# Altium PCB ife18_TS_BMS_Master_STM32.PcbDoc
Units mm, origin at the board's own origin, x right, y up, seen from the top; angles counter-clockwise.
Board outline 90 x 63 mm, 2 copper layers (Top Layer, Bottom Layer); 69 components, 58 nets, 284 pads, 52 vias.
Unrouted connection lines stored in the file: 69.
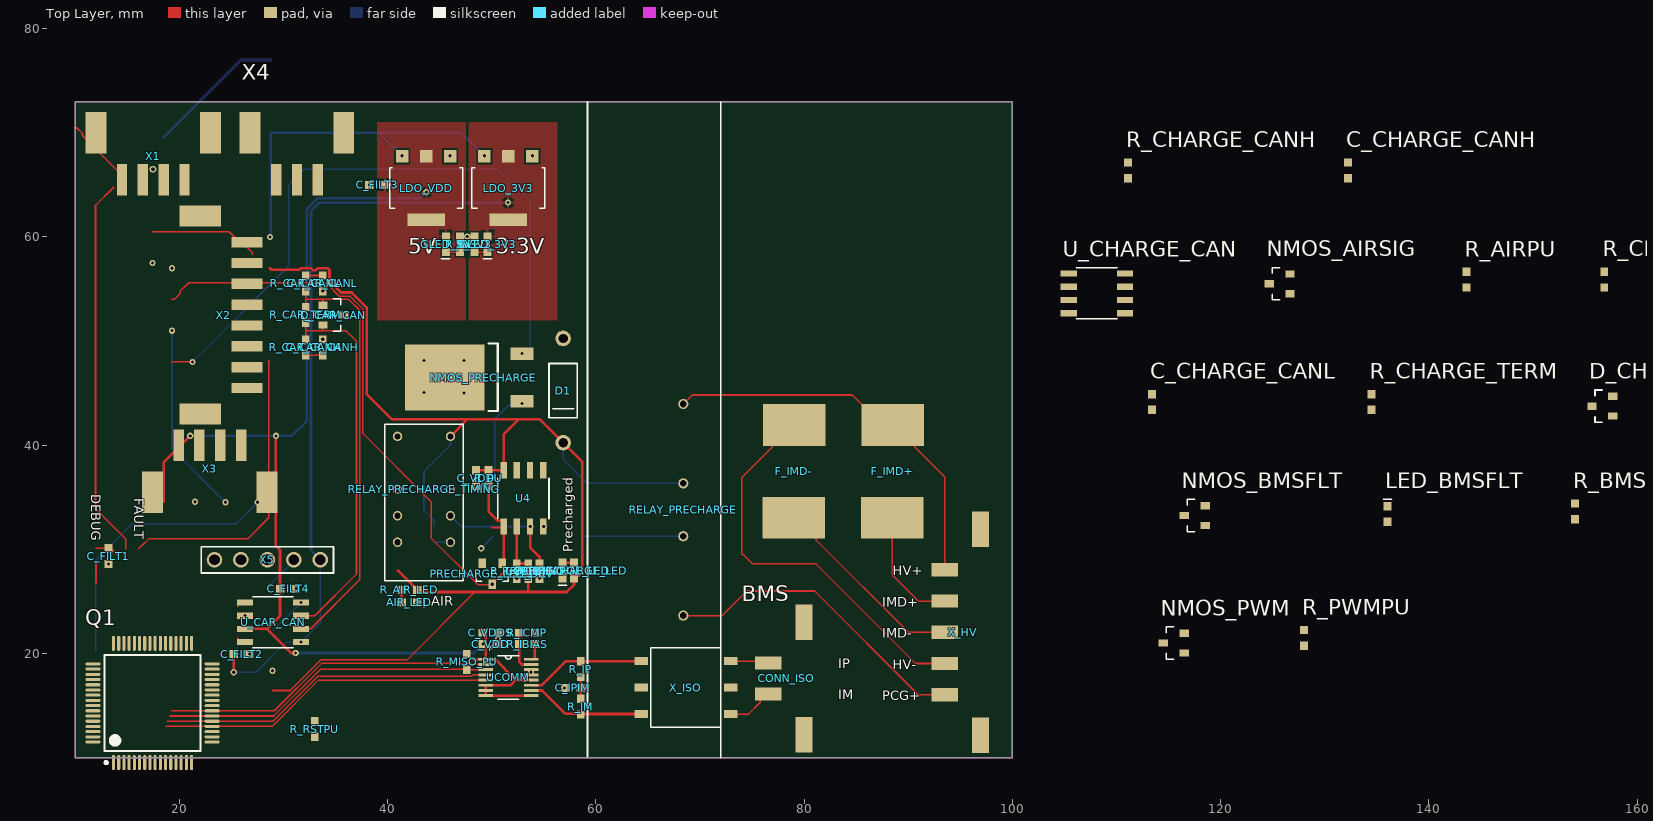
[diagram p0: Top Layer view]
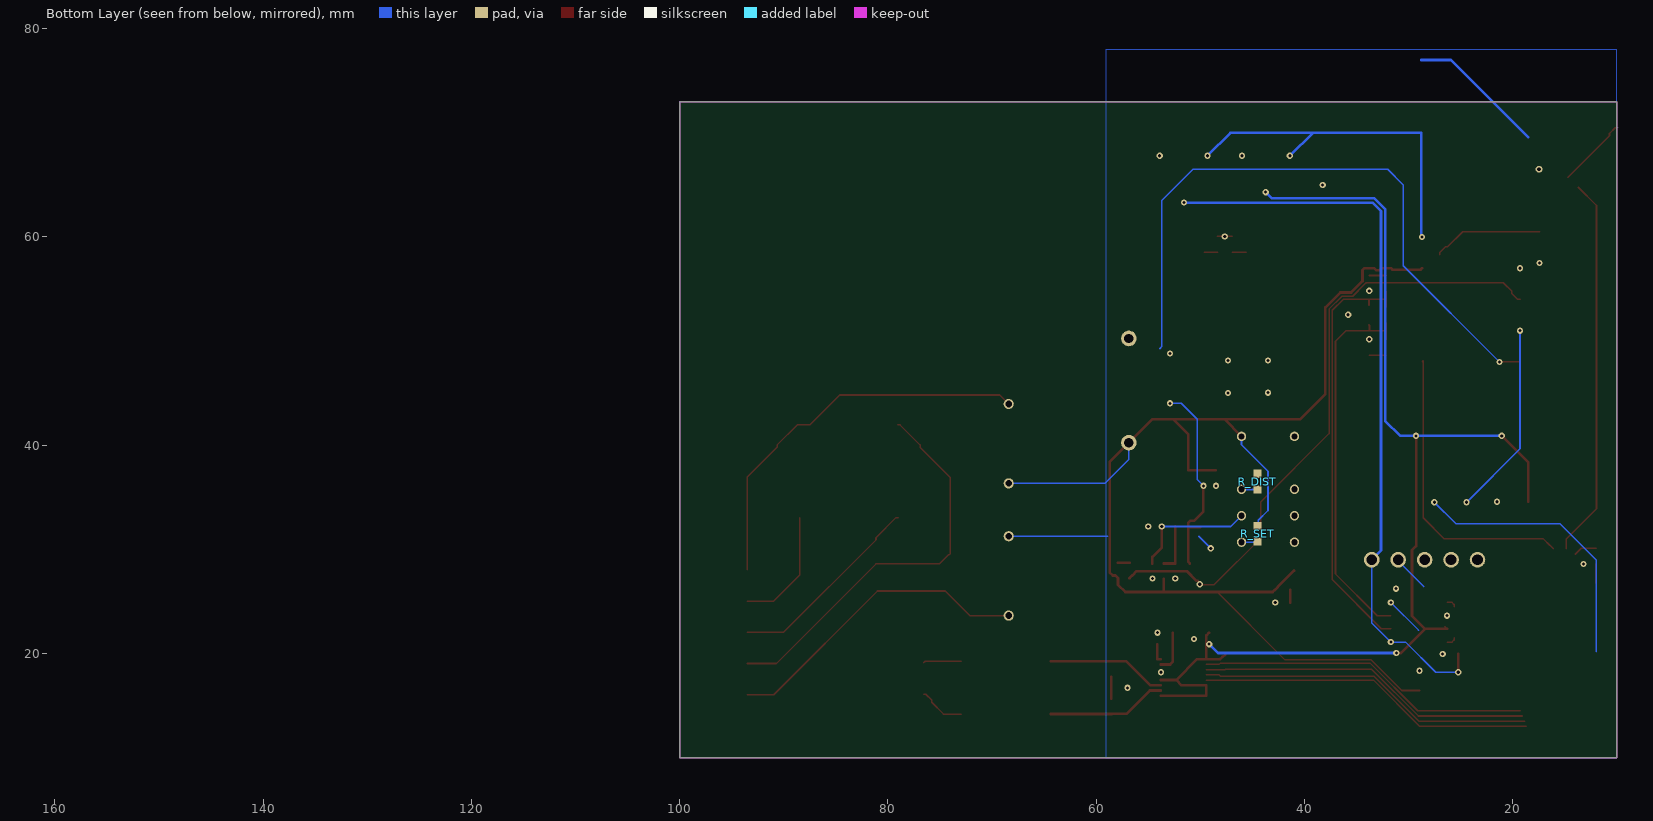
[diagram p1: Bottom Layer view, seen from below]

## Layer stack, top to bottom
Top Solder: solder mask 0.0102, Solder Resist, Dk 3.5
Top Layer: signal copper 0.0356
Dielectric 1: dielectric 0.32, FR-4, Dk 4.8
Bottom Layer: signal copper 0.0356
Bottom Solder: solder mask 0.0102, Solder Resist, Dk 3.5

## Board outline
10,10 10,73 100,73 100,10

## Design rules (kind name [scope] priority, off if disabled: settings)
BoardOutlineClearance [All] p1: gap=0.2 ignorepadtopadclearanceinfootprint=FALSE
Clearance "Board Outline" [OnLayer('Keep-Out Layer')] p1: gap=0.2 ignorepadtopadclearanceinfootprint=FALSE
Clearance "Tractive Net Class" [InNetClass('Tractive')] p2: gap=0.8 ignorepadtopadclearanceinfootprint=FALSE
Clearance [NOT InNetClass('Tractive')] p3: gap=0.152 ignorepadtopadclearanceinfootprint=FALSE
HoleSize [All] p1: absolutevalues=TRUE maxlimit=6.3 minlimit=0.3 maxpercent=80.000 minpercent=20.000
MinimumAnnularRing [All] p1: minimumring=0.076
MinimumSolderMaskSliver [All] p1: minsoldermaskwidth=0
PolygonConnect "SOT223 Planes" [HasFootprint('SOT223')] p1: connectstyle=Direct reliefconductorwidth=0.254 reliefentries=4 polygonreliefangle="90 Angle" airgapwidth=0.254
PolygonConnect [All] p2: connectstyle=Relief reliefconductorwidth=0.254 reliefentries=4 polygonreliefangle="90 Angle" airgapwidth=0.254
RoomDefinition U_Precharge [InComponentClass('U_Precharge')] p1: confinementstyle=ConfineIn formatcopy=TRUE lockcomponents=FALSE outline 39,10 72,10 72,78 39,78
RoomDefinition U_Comms [InComponentClass('U_Comms')] p2: confinementstyle=ConfineIn formatcopy=TRUE lockcomponents=FALSE outline 39,10 100,10 100,78 39,78
RoutingVias [All] p1: holewidth=0.3 width=0.6 viastyle="Through Hole" minholewidth=0.3 minwidth=0.6 maxholewidth=6.3 maxwidth=10
SilkToSilkClearance [All] p1: silktosilkclearance=0
SilkToSolderMaskClearance [IsPad] p1: minsilkscreentomaskgap=0 clearancetoexposedcopper=TRUE
SolderMaskExpansion [All] p1: expansion=0.051
Width [All] p1: maxlimit=2.54 minlimit=0.152 preferedwidth=0.254
26 further rules are at their usual default settings.

## Classes and differential pairs
net class Tractive: HV+ HV- IM_ISO IMD+ IMD- IP_ISO Precharge+
component class U_Precharge: AIR_LED C_TIMING C_VDD D1 NMOS_PRECHARGE PRECHARGE_LED PRECHARGE_LED_DRV R_AIR_LED R_DIST R_PRECHARGE_LED R_PU R_SET R_TRIG_B R_TRIG_T RELAY_PRECHARGE RELAY_PRECHARGE_TIMING U4
component class U_Comms: C_IPIM C_VDD C_VDDS CONN_ISO R_IBIAS R_ICMP R_IM R_IP R_MISO_PU UCOMM X_ISO
component class ife18_TS_BMS_Master: C_CAR_CANH C_CAR_CANL C_CHARGE_CANH C_CHARGE_CANL C_FILT1 C_FILT2 C_FILT3 C_FILT4 D_CAR_CAN D_CHARGE_CAN F_IMD+ F_IMD- GLED_3V3 GLED_5V GLED_DEBUG LDO_3V3 LDO_VDD LED_BMSFLT NMOS_AIRSIG NMOS_BMSFLT NMOS_PWM Q1 R_3V3 R_5V R_AIRPU R_BMSFLT R_CAR_CANH R_CAR_CANL R_CAR_TERM R_CHARGE_CANH R_CHARGE_CANL R_CHARGE_TERM R_PWMPU R_RSTPU U_CAR_CAN U_CHARGE_CAN X1 X2 X3 X4 X5 X_HV

## Components (designator, comment, footprint, x,y, rotation, side; value= is the part's Value field where it differs from the comment)
AIR_LED "" LEDRED-0603 42.1,24.9 r0 top
C_CAR_CANH "560p" CAP-0603 33.775,49.4 r90 top
C_CAR_CANL "560p" CAP-0603 33.775,55.55 r270 top
C_CHARGE_CANH "560p" CAP-0603 132.216,66.402 r90 top
C_CHARGE_CANL "560p" CAP-0603 113.412,44.152 r90 top
C_FILT1 "1u" CAP-0603 13.2,29.35 r90 top
C_FILT2 "1u" CAP-0603 25.975,19.95 r180 top
C_FILT3 "1u" CAP-0603 39,65 r0 top
C_FILT4 "1u" CAP-0603 30.45,26.225 r180 top
C_IPIM "10n" CAP-0603 57.8,16.7 r180 top
C_TIMING "33u" CAP-0603 54.6,27.9 r90 top
C_VDD "1u" CAP-0603 48.5,36.85 r90 top
C_VDD "1u" CAP-0603 49.9,20.9 r180 top
C_VDDS "1u" CAP-0603 49.9,22 r180 top
CONN_ISO "" 43650-0224 80,17.6 r90 top
D1 "" DO41-10 56.853,45.25 r270 top
D_CAR_CAN "DIODE-SOT23_PESD1CAN" SOT23 34.8,52.5 r270 top
D_CHARGE_CAN "DIODE-SOT23_PESD1CAN" SOT23 156.664,43.752 r90 top
F_IMD+ "FUSE_885" FUSE_885 88.5,37.5 r270 top
F_IMD- "FUSE_885" FUSE_885 79,37.5 r90 top
GLED_3V3 "" LEDGREEN-0603 49.6,59.3 r270 top
GLED_5V "" LEDGREEN-0603 45.6,59.3 r270 top
LDO_3V3 "3V3" SOT223 51.6,64.7 r180 top
LDO_VDD "5V" SOT223 43.7,64.7 r180 top
LED_BMSFLT "LEDRED-0603" LEDRED-0603 136.007,33.402 r90 top
NMOS_AIRSIG "NMOS-SOT23" SOT23 125.659,55.502 r90 top
NMOS_BMSFLT "NMOS-SOT23" SOT23 117.506,33.252 r90 top
NMOS_PRECHARGE "NMOS-TO252" TO252 45.491,46.479 r90 top
NMOS_PWM "NMOS-SOT23" SOT23 115.5,21 r90 top
PRECHARGE_LED "" LEDGREEN-0603 56.8,27.97 r270 top
PRECHARGE_LED_DRV "" SOT23 50.05,27.65 r180 top
Q1 "STM32F446RET6" TSQFP50P1200X1200X160-64N 17.43,15.25 r90 top
R_3V3 "200" RES-0603 48.35,59.3 r90 top
R_5V "200" RES-0603 46.95,59.3 r90 top
R_AIR_LED "1K" RES-0603 42.1,26.1 r180 top
R_AIRPU "10K" RES-0603 143.61,55.902 r90 top
R_BMSFLT "860" RES-0603 154.033,33.652 r90 top
R_CAR_CANH "100" RES-0603 32.15,49.4 r270 top
R_CAR_CANL "100" RES-0603 32.15,55.55 r90 top
R_CAR_TERM "120" RES-0603 32.15,52.525 r270 top
R_CHARGE_CANH "100" RES-0603 111.115,66.402 r90 top
R_CHARGE_CANL "100" RES-0603 156.836,55.902 r90 top
R_CHARGE_TERM "120" RES-0603 134.488,44.152 r90 top
R_DIST "1.5K" RES-0603 44.5,36.5 r90 bottom
R_IBIAS "1K" RES-0603 53.4,20.9 r0 top
R_ICMP "1K" RES-0603 53.4,22 r180 top
R_IM "50" RES-0603 58.55,14.9 r90 top
R_IP "50" RES-0603 58.55,18.5 r270 top
R_MISO_PU "4K" RES-0603 47.6,19.2 r90 top
R_PRECHARGE_LED "1K" RES-0603 57.9,27.97 r270 top
R_PU "10K" RES-0603 49.7,36.85 r90 top
R_PWMPU "10K" RES-0603 128,21.5 r90 top
R_RSTPU "10K" RES-0603 33,12.75 r90 top
R_SET "220K" RES-0603 44.5,31.5 r90 bottom
R_TRIG_B "6.3K" RES-0603 52.4,27.9 r90 top
R_TRIG_T "3.7K" RES-0603 53.5,27.9 r270 top
RELAY_PRECHARGE "COTO9104" 9104-SIP4 68.4,33.8 r270 top
RELAY_PRECHARGE_TIMING "" RELAY-DPDT_EC2 43.5,34.5 r270 top
U4 "" SOIC8 53.05,34.9 r0 top
U_CAR_CAN "IC-SOIC8_MCP2562" SOIC8 29,23 r270 top
U_CHARGE_CAN "IC-SOIC8_MCP2562" SOIC8 108.108,54.577 r90 top
UCOMM "IC-MSOP16_LTC6820" MSOP16 51.6,17.7 r0 top
X1 "Molex 505575-04 4 Position 2.00mm pitch connector wire to board connector Datasheet" 505578-04 17.5,66 r0 top
X2 "POS8_ML505578-08" 505575-08 26,52.5 r90 top
X3 "Molex 505575-04 4 Position 2.00mm pitch connector wire to board connector Datasheet" 505578-04 22.93,39.5 r180 top
X4 "Molex 505575-03 3 Position 2.00mm pitch connector wire to board connector Datasheet" 505578-03 31.3,66 r0 top
X5 "" POS5_254MM_MALE 28.46,29 r180 top
X_HV "Molex - Micro-Fit 3.0 Series connector,  3.00mm (0.118\") pitch header, 5 positions." 43650-0524 97,22 r90 top
X_ISO "XFMR_HM2101NL" HM2101 68.65,16.725 r90 top

## Footprints (in the part's own frame and the unit in brackets; to place one, negate y for a bottom-side part, rotate by r counter-clockwise, add the part's x,y. Pads: shape width x height; smd on the part's side, far side on the other; paste and mask are expansions set on the pad)
9104-SIP4 [mm]
  round 0.975 / inner round 1.524 / far side round 0.975 hole 0.65: 1(-10.16,0) 3(-2.54,0) 5(2.54,0) 7(10.16,0)
  body extent -12.03,-3.23 12.03,2.97, height 8.14
43650-0224 [mm]
  rect 1.27x2.54 smd: P$1(1.5,3.43) P$2(-1.5,3.43)
  rect 3.43x1.65 smd: TAB1(5.39,0) TAB2(-5.39,0)
  body extent -6.82,-2.47 6.83,4.1, height 9.95
43650-0524 [mm]
  rect 1.27x2.54 smd: P$1(6.036,3.503) P$2(3.036,3.503) P$3(0.036,3.503) P$4(-2.964,3.503) P$5(-5.964,3.503)
  rect 3.43x1.65 smd: TAB1(9.926,0.073) TAB2(-9.854,0.073)
  body extent -11.32,-2.47 11.32,4.1, height 9.95
505575-08 [mm]
  rect 1x3 smd: 1(-7,-0.5) 2(-5,-0.5) 3(-3,-0.5) 4(-1,-0.5) 5(1,-0.5) 6(3,-0.5) 7(5,-0.5) 8(7,-0.5)
  rect 2x4 smd: P$3(-9.5,4) P$4(9.5,4)
  body extent -10,-1.41 10,6, height 8.62
505578-03 [mm]
  rect 1x3 smd: 1(-2,-0.5) 2(0,-0.5) 3(2,-0.5)
  rect 2x4 smd: P$3(-4.5,4) P$4(4.5,4)
  body extent -5,-1.1 5,8.35, height 5.9
505578-04 [mm]
  rect 1x3 smd: 1(-3,-0.5) 2(-1,-0.5) 3(1,-0.5) 4(3,-0.5)
  rect 2x4 smd: P$3(-5.5,4) P$4(5.5,4)
  body extent -6,-1.02 6,8.43, height 5.9
CAP-0603 [mm]
  rect 0.8x0.75 smd: 1(-0.75,0) 2(0.75,0)
  body extent -0.8,-0.4 0.8,0.42, height 0.81
DO41-10 [mm]
  round 1.5 hole 0.9 unplated: A(-5,0) K(5,0)
  silkscreen extent -2.6,-1.35 2.6,1.35, body extent -2.6,-1.34 2.6,1.35, height 2.85
FUSE_885 [mm]
  rect 4x6 smd: 1(-4.45,0) 2(4.45,-0.05)
  body extent -5.45,-2.4 5.45,2.4, height 4.95
HM2101 [mm]
  rect 0.76x1.27 smd: 1(-2.54,-4.3) 2(0,-4.3) 3(2.54,-4.3) 4(2.54,4.3) 5(0,4.3) 6(-2.54,4.3)
  silkscreen extent -3.81,-3.36 3.81,3.36, body extent -3.81,-4.44 3.81,4.44, height 5.71
LEDGREEN-0603 [mm]
  rect 0.8x0.75 smd: A(-0.75,0) K(0.75,0)
  silkscreen extent 1.4,-0.42 1.4,0.38, body extent -0.8,-0.4 0.8,0.4, height 0.53
LEDRED-0603 [mm]
  rect 0.8x0.75 smd: A(-0.75,0) K(0.75,0)
  silkscreen extent 1.4,-0.42 1.4,0.38, body extent -0.8,-0.4 0.8,0.4, height 0.53
MSOP16 [mil]
  rect 55x11 smd: 1(-86,68.95) 2(-86,49.25) 3(-86,29.55) 4(-86,9.85) 5(-86,-9.85) 6(-86,-29.55) 7(-86,-49.25) 8(-86,-68.95) 9(86,-68.95) 10(86,-49.25) 11(86,-29.55) 12(86,-9.85) 13(86,9.85) 14(86,29.55) 15(86,49.25) 16(86,68.95)
  silkscreen extent -39,-82 39,82, body extent -99,-81 100,82, height 43
POS5_254MM_MALE [mm]
  round 1.5 hole 1.02 unplated: P$1(-5.08,0) P$2(-2.54,0) P$3(0,0) P$4(2.54,0) P$5(5.08,0)
  silkscreen extent -6.35,-1.27 6.35,1.27, body extent -6.35,-1.24 6.35,1.25, height 8.54
RELAY-DPDT_EC2 [mm]
  round 0.9 / inner round 1.524 / far side round 0.9 hole 0.6: 1(-6.35,2.54) 3(-1.27,2.54) 4(1.27,2.54) 5(3.81,2.54) 8(3.81,-2.54) 9(1.27,-2.54) 10(-1.27,-2.54) 12(-6.35,-2.54)
  silkscreen extent -7.5,-3.75 7.5,3.75, body extent -7.4,-3.75 7.6,3.75, height 8.9
RES-0603 [mm]
  rect 0.8x0.75 smd: 1(-0.75,0) 2(0.75,0)
  body extent -0.8,-0.4 0.8,0.4, height 0.44
SOIC8 [mm]
  rect 0.6x1.55 smd: 1(-1.905,-2.7) 2(-0.635,-2.7) 3(0.635,-2.7) 4(1.905,-2.7) 5(1.905,2.7) 6(0.635,2.7) 7(-0.635,2.7) 8(-1.905,2.7)
  silkscreen extent -2.45,-1.95 2.45,1.95, body extent -2.45,-3.01 2.45,3.01, height 1.5
SOT23 [mm]
  rect 0.7x0.9 smd: 1(-0.95,-1) 2(0.95,-1) 3(0,1)
  silkscreen extent -1.55,0 1.55,0.71, body extent -1.45,-1.41 1.45,1.41, height 1.5
SOT223 [mm]
  rect 1.2x1.2 smd: 1(-2.3,-3.05) 2(0,-3.05) 3(2.3,-3.05)
  rect 3.6x1.2 smd: 4(0,3.05)
  silkscreen extent -3.5,-1.95 3.5,1.95, body extent -3.25,-3.52 3.25,3.5, height 1.8
TO252 [mm]
  rect 1.2x2.2 smd: 1(-2.279,-7.409) 3(2.321,-7.409)
  rect 6.35x7.62 smd: 2(0.021,-0.009)
  silkscreen extent -3.2,-5.09 3.3,-4.2, body extent -3.22,-7.29 3.28,1.41, height 2.3
TSQFP50P1200X1200X160-64N [mm] "TSQFP, 64-Leads, Body 10.00x10.00mm, Pitch 0.50mm, IPC Medium Density"
  oval 1.45x0.3 smd: 1(-5.725,3.75) 2(-5.725,3.25) 3(-5.725,2.75) 4(-5.725,2.25) 5(-5.725,1.75) 6(-5.725,1.25) 7(-5.725,0.75) 8(-5.725,0.25) 9(-5.725,-0.25) 10(-5.725,-0.75) 11(-5.725,-1.25) 12(-5.725,-1.75) 13(-5.725,-2.25) 14(-5.725,-2.75) 15(-5.725,-3.25) 16(-5.725,-3.75) 33(5.725,-3.75) 34(5.725,-3.25) 35(5.725,-2.75) 36(5.725,-2.25) 37(5.725,-1.75) 38(5.725,-1.25) 39(5.725,-0.75) 40(5.725,-0.25) 41(5.725,0.25) 42(5.725,0.75) 43(5.725,1.25) 44(5.725,1.75) 45(5.725,2.25) 46(5.725,2.75) 47(5.725,3.25) 48(5.725,3.75)
  oval 0.3x1.45 smd: 17(-3.75,-5.725) 18(-3.25,-5.725) 19(-2.75,-5.725) 20(-2.25,-5.725) 21(-1.75,-5.725) 22(-1.25,-5.725) 23(-0.75,-5.725) 24(-0.25,-5.725) 25(0.25,-5.725) 26(0.75,-5.725) 27(1.25,-5.725) 28(1.75,-5.725) 29(2.25,-5.725) 30(2.75,-5.725) 31(3.25,-5.725) 32(3.75,-5.725) 49(3.75,5.725) 50(3.25,5.725) 51(2.75,5.725) 52(2.25,5.725) 53(1.75,5.725) 54(1.25,5.725) 55(0.75,5.725) 56(0.25,5.725) 57(-0.25,5.725) 58(-0.75,5.725) 59(-1.25,5.725) 60(-1.75,5.725) 61(-2.25,5.725) 62(-2.75,5.725) 63(-3.25,5.725) 64(-3.75,5.725)
  silkscreen extent -5.85,-4.6 4.6,4.6, body extent -6,-6 6,6, height 1.6

## Part data
AIR_LED: library part LEDRED-0603
C_CAR_CANH C_CAR_CANL C_CHARGE_CANH C_CHARGE_CANL C_FILT1 C_FILT2 C_FILT3 C_FILT4 C_IPIM C_TIMING C_VDD C_VDD C_VDDS: library part CAP-0603
CONN_ISO: library part POS2_43650-0224, Package=43650-0224, DeviceName=43650-0224, DeviceSetName=HEADER_POS2_?, GateName_1=G$1, LibraryName="MOLEX Micro-Fit", SymbolName_1=HEADER_POS2
D1: library part DIODE-DO41-10
GLED_3V3 GLED_5V PRECHARGE_LED: library part LEDGREEN-0603
LDO_3V3 LDO_VDD: library part LDO-SOT223_SPX1117
NMOS_PRECHARGE: Package=TO252, DeviceSetName=DMP10H400SK3-13, GateName_1=G$1, LibraryName=IFE_Transistors, SymbolName_1=LABELED-PMOS
PRECHARGE_LED_DRV: library part NMOS-SOT23
Q1: library part IC-LQFP64_STM32F446RET6, "IC MCU 32BIT 512KB FLASH 64LQFP", Case/Package=LQFP, Frequency=180MHz, Manufacturer=STMicroelectronics, Max Operating Temperature=85°C, Max Power Dissipation=345mW, Max Supply Voltage=3.6V, Min Operating Temperature=-40°C, Min Supply Voltage=1.7V, Core Architecture=ARM, Data Bus Width=32b, Interface=CAN,EBI/EMI,I2C,I2S,IrDA,LIN,SD,SPI,UART,USART,USB, Lead Free="Lead Free", Manufacturer Part Number=STM32F446RET6, Max Frequency=180MHz, Memory Size=512KB, Memory Type=FLASH, Mount="Surface Mount", Number of I/Os=50, Number of Pins=64, Number of Programmable I/O=50, Number of Timers/Counters=14, Oscillator Type=Internal, Packaging=Tray, Peripherals="Brown-out Detect/Reset,DMA,LVD,POR,PWM,WDT", Pricing 1="1 = 8.59000, 10 = 7.76200, 160 = 6.42581, 640 = 5.59550, 1120 = 4.87350 (USD)", RAM Size=132KB, REACH SVHC="No SVHC", RoHS=Yes, Stock 1=9529, Supplier 1=Digi-Key, Watchdog Timer=Yes
R_3V3 R_5V R_AIR_LED R_AIRPU R_BMSFLT R_CAR_CANH R_CAR_CANL R_CAR_TERM R_CHARGE_CANH R_CHARGE_CANL R_CHARGE_TERM R_DIST R_IBIAS R_ICMP R_IM R_IP R_MISO_PU R_PRECHARGE_LED R_PU R_PWMPU R_RSTPU R_SET R_TRIG_B R_TRIG_T: library part RES-0603
RELAY_PRECHARGE: Package=9104-SIP4, DeviceSetName=COTO9104, GateName_1=G$1, LibraryName=Discharge_Components_Altium_Export, SymbolName_1=SPST_REED
RELAY_PRECHARGE_TIMING: library part RELAY_EC2, Package=DPDT_2.54, DeviceSetName=EC2, GateName_1=G$1, LibraryName=KEMET, SymbolName_1=MONOSTABLERELAY
U4: library part IC-SOIC8_LM393
X1 X3: library part POS4_ML505578-04, Package=505575-04, DeviceSetName=505575-04, GateName_1=G$1, LibraryName="MOLEX Micro-Lock", SymbolName_1=4POS
X2: Manufacturer=Molex, Manufacturer Part Number=172065-0308, ComponentLink1Description=http://datasheet.octopart.com/172065-0308-Molex-datasheet-101610459.pdf?src-supplier=Farnell, ComponentLink1URL=http://datasheet.octopart.com/172065-0308-Molex-datasheet-101610459.pdf?src-supplier=Farnell, ComponentLink2Description=http://datasheet.octopart.com/172065-0308-Molex-datasheet-96710946.pdf?src-supplier=Farnell, ComponentLink2URL=http://datasheet.octopart.com/172065-0308-Molex-datasheet-96710946.pdf?src-supplier=Farnell, Pricing 1="1 = 9.17000, 68 = 7.57265, 136 = 7.37338, 544 = 6.17768, 1020 = 5.46027 (USD)", Stock 1=323, Supplier 1=Digikey
X4: library part POS3_ML505578-03, Package=505575-03, DeviceSetName=505575-03, GateName_1=G$1, LibraryName="MOLEX Micro-Lock", SymbolName_1=3POS
X5: library part POS5_254MM_MALE, Package=43650-0524, DeviceName=43650-0524, DeviceSetName=HEADER_POS5_?, GateName_1=G$1, LibraryName="MOLEX Micro-Fit", SymbolName_1=HEADER_POS5
X_HV: library part POS5_MF43650-0524, Package=43650-0524, DeviceName=43650-0524, DeviceSetName=HEADER_POS5_?, GateName_1=G$1, LibraryName="MOLEX Micro-Fit", SymbolName_1=HEADER_POS5

## Via types
v1: diameter 0.6, hole 0.3, Top Layer to Bottom Layer, 52 vias

## Nets (pads, with @x,y where several pads share a name; then routed paths per layer and width w, separated by ;. In a path a pad name is that pad's centre, name@x,y a point inside that pad or via, vN(x,y) a via of type N, cw(c..) or ccw(c..) an arc to the next point about the centre after c; other vN are vias at no path point)
3V3: C_FILT1.2 C_FILT2.2 GLED_3V3.A LDO_3V3.2 LDO_3V3.4 Q1.1 Q1.13 Q1.19 Q1.32 Q1.48 Q1.64 R_AIRPU.1 R_RSTPU.1 U_CAR_CAN.5 U_CHARGE_CAN.5 X5.P$1 | length 73.5
  Top Layer w0.152: 12,30.1 13.425,30.1 14,29.525
  Top Layer w0.254: v1@25.225,18.175 v1(25.225,18.2) C_FILT2.2
  Bottom Layer w0.152: v1(25.225,18.2) 27.4,18.2 30.295,21.095 v1(31.7,21.095) 33.54,22.935 X5.P$1
  Bottom Layer w0.254: X5.P$1 32.65,29.89 32.65,62.5 33.45,63.3 42.936,63.3 42.949,63.286 43.286,63.286 43.3,63.3 v1@51.561,63.3 ; v1@51.561,63.286 v1(51.575,63.3)
5V: C_FILT3.2 C_FILT4.2 C_VDD.2@49.15,20.9 C_VDDS.2 GLED_5V.A LDO_VDD.2 LDO_VDD.4 R_MISO_PU.2 R_PWMPU.1 U_CAR_CAN.3 U_CHARGE_CAN.3 UCOMM.1 UCOMM.6 UCOMM.7 UCOMM.8 UCOMM.9 UCOMM.12 X3.1 | length 113.8
  Top Layer w0.152: U_CAR_CAN.3 U_CAR_CAN.3@26.524,22.589 ; v1@29.25,40.875 v1(29.275,40.9)
  Top Layer w0.254: 18.5,34.57 18.5,38.35 v1(21.05,40.9) ; U_CAR_CAN.3 28.425,22.365 ; v1(29.275,40.9) 29.275,30.325 29.675,29.925 29.675,23.615 28.425,22.365 ; v1(31.175,20.05) 30.74,20.05 28.425,22.365 ; R_MISO_PU.2 47.6,19.925 47.848,19.677 47.873,19.677 48.099,19.451 UCOMM.1 ; C_VDDS.2 49.168,22 49.416,21.752 49.416,20.9 UCOMM.1 ; UCOMM.9 UCOMM.8 UCOMM.7 UCOMM.6 51.801,16.949 52.302,17.45 ; UCOMM.12 52.302,17.45 ; UCOMM.1 50.3,19.451 52.302,17.45
  Bottom Layer w0.254: v1(21.05,40.9) v1(29.275,40.9) 30.794,40.9 32.244,42.35 32.244,62.668 33.282,63.706 43.131,63.706 v1(43.725,64.3) ; v1(31.175,20.05) 48.3,20.05 v1(49.15,20.9)
AIR: C_VDD.2@48.5,37.6 D1.K NMOS_AIRSIG.1 R_AIR_LED.1 R_PRECHARGE_LED.2 R_PU.2 R_SET.2 R_TRIG_T.2 RELAY_PRECHARGE.3 RELAY_PRECHARGE_TIMING.1 U4.8 | length 133.1
  Top Layer w0.152: 28.95,16.45 30.644,16.45 33.577,19.383 41.858,19.383 48.375,25.9
  Top Layer w0.254: 28.7,57 28.84,56.86 31.54,56.86 31.659,56.979 32.641,56.979 32.808,56.812 33.117,56.812 33.284,56.979 34.266,56.979 34.429,56.816 34.429,55.784 34.411,55.766 35.516,54.66 36.549,54.66 37.985,53.224 37.985,44.915 40.4,42.5 47.69,42.5 ; 41,27.97 41,27.95 42.577,26.373 42.577,26.348 42.825,26.1 R_AIR_LED.1 43.05,25.9 48.375,25.9 53.5,25.9 ; RELAY_PRECHARGE_TIMING.1 47.69,42.5 ; C_VDD.2@48.5,37.6 R_PU.2 U4.8 51.145,41.021 52.624,42.5 ; R_TRIG_T.2 53.5,25.9 ; 47.69,42.5 52.624,42.5 ; 52.624,42.5 54.603,42.5 D1.K 58.7,38.403 58.7,27.8 58.393,27.493 58.148,27.493 57.9,27.245 R_PRECHARGE_LED.2 57.9,26.6 57.2,25.9 53.5,25.9
  Bottom Layer w0.152: R_SET.2 44.436,32.314 44.436,32.789 43.5,33.725 43.5,37.5 46.04,40.04 RELAY_PRECHARGE_TIMING.1 ; D1.K 56.853,38.647 59.16,36.34 RELAY_PRECHARGE.3
BMS_CS: Q1.20 UCOMM.5 | length 32.6
  Top Layer w0.152: 18.7,13 28.918,13 33.368,17.45 UCOMM.5
BMS_FLT: LED_BMSFLT.K NMOS_BMSFLT.3 X2.4
BMS_MISO: Q1.22 R_MISO_PU.1 UCOMM.3 | length 32.2
  Top Layer w0.152: 19.09,14 29.056,14 33.531,18.475 47.6,18.475 R_MISO_PU.1 ; R_MISO_PU.1 UCOMM.3
BMS_MOSI: Q1.23 UCOMM.2 | length 32.1
  Top Layer w0.152: 19.275,14.5 29.125,14.5 33.704,19.079 48.07,19.079 48.198,18.951 UCOMM.2
BMS_SCK: Q1.21 UCOMM.4 | length 32.4
  Top Layer w0.152: 18.86,13.5 28.987,13.5 33.308,17.821 48.07,17.821 48.198,17.95 UCOMM.4
CANH: X2.3
CANL: X2.2
CAR_CANRx: Q1.44 U_CAR_CAN.4 | length 1
  Top Layer w0.152: 25.606,21.494 25.606,21.319 25.83,21.095 U_CAR_CAN.4
CAR_CANTx: Q1.45 U_CAR_CAN.1 | length 1
  Top Layer w0.152: 25.606,24.506 25.606,24.681 25.83,24.905 U_CAR_CAN.1
CARCANH: D_CAR_CAN.2 R_CAR_CANH.1 R_CAR_TERM.2 U_CAR_CAN.7 | length 36.8
  Top Layer w0.152: U_CAR_CAN.7 33.01,23.635 37.02,27.645 37.02,49.98 36,51 33.75,51 ; R_CAR_CANH.1 32.15,51 ; R_CAR_TERM.2 32.15,51 ; D_CAR_CAN.2 33.75,51.5 33.75,51 ; 32.15,51 33.75,51
CARCANL: D_CAR_CAN.1 R_CAR_CANL.1 R_CAR_TERM.1 U_CAR_CAN.6 | length 41.1
  Top Layer w0.152: U_CAR_CAN.6 31.724,22.389 32.614,22.389 37.325,27.1 37.325,52.95 36.275,54 33.825,54 ; R_CAR_TERM.1 32.15,54 ; R_CAR_CANL.1 32.15,54 ; D_CAR_CAN.1 33.8,53.975 33.825,54 ; 32.15,54 33.825,54
CHARGE_CANRx: Q1.33 U_CHARGE_CAN.4
CHARGE_CANTx: Q1.34 U_CHARGE_CAN.1
CHARGECANH: D_CHARGE_CAN.2 R_CHARGE_CANH.1 R_CHARGE_TERM.2 U_CHARGE_CAN.7
CHARGECANL: D_CHARGE_CAN.1 R_CHARGE_CANL.1 R_CHARGE_TERM.1 U_CHARGE_CAN.6
CURR: Q1.26 X3.4 | length 26.7
  Top Layer w0.152: v1@27.5,34.57 27.525,34.545 v1(27.525,34.525)
  Bottom Layer w0.152: 11.975,20.15 11.975,28.975 15.475,32.475 25.475,32.475 v1(27.525,34.525)
CURR_HR: Q1.27 X2.8 X3.3
FAN_PWM: NMOS_PWM.1 Q1.37
FAN_PWM_5V: NMOS_PWM.3 R_PWMPU.2 X2.7
GND: AIR_LED.K C_CAR_CANH.2 C_CAR_CANL.2 C_CHARGE_CANH.2 C_CHARGE_CANL.2 C_FILT1.1 C_FILT2.1 C_FILT3.1 C_FILT4.1 C_IPIM.2 C_TIMING.1 C_VDD.1 C_VDDS.1 D1.A D_CAR_CAN.3 D_CHARGE_CAN.3 LDO_3V3.1 LDO_VDD.1 NMOS_AIRSIG.2 NMOS_BMSFLT.2 NMOS_PRECHARGE.2 NMOS_PWM.2 PRECHARGE_LED_DRV.2 Q1.12 Q1.18 Q1.31 Q1.47 Q1.60 Q1.63 R_3V3.2 R_5V.2 R_DIST.2 R_ICMP.1 R_TRIG_B.1 RELAY_PRECHARGE.5 RELAY_PRECHARGE_TIMING.12 U4.4 U_CAR_CAN.2 U_CAR_CAN.8 U_CHARGE_CAN.2 U_CHARGE_CAN.8 UCOMM.13 UCOMM.14 X1.3 X1.4 X2.6 X3.2 X5.P$5 | length 15.2
  Top Layer w0.152: R_5V.2 v1(47.65,60.05) R_3V3.2 ; UCOMM.13 UCOMM.14
  Bottom Layer w0.152: 29.045,22.25 v1(31.7,24.905) ; 58.9,31.26 RELAY_PRECHARGE.5
  other v1: 57,16.7 53.775,18.2 26.725,19.95 50.6,21.4 54.1,22 26.3,23.635 42.8,24.9 31.2,26.225 52.4,27.2 54.6,27.2 13.2,28.6 55,32.2 48.5,36.1 47.35,45.025 43.5,45.05 43.5,48.125 47.35,48.125 33.775,50.175 35.8,52.525 33.775,54.825 38.25,65 17.43,66.5 17.5,66.5 46,67.8 53.9,67.8
HV+: F_IMD+.1 RELAY_PRECHARGE.1 X_HV.P$1 | length 37.8
  Top Layer w0.152: RELAY_PRECHARGE.1 69.266,44.826 84.624,44.826 87.5,41.95 F_IMD+.1 88.716,41.95 90.639,40.026 90.639,39.811 93.497,36.953 X_HV.P$1
HV-: F_IMD-.2 X_HV.P$4 | length 38.4
  Top Layer w0.152: F_IMD-.2 78.834,41.95 76.911,40.026 76.911,39.811 74,36.9 74,29.589 74.089,29.5 74.165,29.5 75.065,28.6 81.139,28.6 90.703,19.036 X_HV.P$4
IBIAS: R_IBIAS.2 UCOMM.16 | length 1.8
  Top Layer w0.254: UCOMM.16 54.137,19.451 54.15,19.464 R_IBIAS.2
ICMP: R_IBIAS.1 R_ICMP.2 UCOMM.15 | length 4
  Top Layer w0.254: R_ICMP.2 R_IBIAS.1 52.65,19.2 52.899,18.951 UCOMM.15
IM: R_IM.1 UCOMM.10 X_ISO.6 | length 11.5
  Top Layer w0.254: UCOMM.10 54.851,16.449 57.1,14.2 58.5,14.2 R_IM.1 58.585,14.185 X_ISO.6
IM_ISO: CONN_ISO.P$2 X_ISO.1 | length 4.5
  Top Layer w0.152: X_ISO.1 74.655,14.185 75.796,15.326 75.796,15.541 76.354,16.1 CONN_ISO.P$2
IMD+: F_IMD+.2 X_HV.P$2 | length 11.6
  Top Layer w0.152: F_IMD+.2 88.45,27.55 90.964,25.036 X_HV.P$2
IMD-: F_IMD-.1 X_HV.P$3 | length 19.2
  Top Layer w0.152: F_IMD-.1 79.216,33.05 81.139,31.126 81.139,30.911 90.014,22.036 X_HV.P$3
IMD_FLT: X1.2 X2.5 | length 10.6
  Top Layer w0.152: 17.43,60.5 24.8,60.5 26.226,59.074 26.441,59.074 27,58.516 27,58.3
IP: R_IP.1 UCOMM.11 X_ISO.4 | length 11.5
  Top Layer w0.254: UCOMM.11 54.8,16.949 57.1,19.25 R_IP.1 64.335,19.25 X_ISO.4
IP_ISO: CONN_ISO.P$1 X_ISO.3 | length 3.7
  Top Layer w0.152: X_ISO.3 76.405,19.265 CONN_ISO.P$1
NetAIR_LED_A: AIR_LED.A R_AIR_LED.2 | length 1.2
  Top Layer w0.254: AIR_LED.A R_AIR_LED.2
NetC_CAR_CANH_1: C_CAR_CANH.1 R_CAR_CANH.2 | length 1.6
  Top Layer w0.152: R_CAR_CANH.2 C_CAR_CANH.1
NetC_CAR_CANL_1: C_CAR_CANL.1 R_CAR_CANL.2 | length 1.6
  Top Layer w0.152: R_CAR_CANL.2 C_CAR_CANL.1
NetC_CHARGE_CANH_1: C_CHARGE_CANH.1 R_CHARGE_CANH.2
NetC_CHARGE_CANL_1: C_CHARGE_CANL.1 R_CHARGE_CANL.2
NetC_IPIM_1: C_IPIM.1 R_IM.2 R_IP.2 | length 2.1
  Top Layer w0.254: R_IM.2 C_IPIM.1 R_IP.2
NetGLED_3V3_K: GLED_3V3.K R_3V3.1 | length 1.3
  Top Layer w0.152: R_3V3.1 GLED_3V3.K
NetGLED_5V_K: GLED_5V.K R_5V.1 | length 1.4
  Top Layer w0.152: GLED_5V.K R_5V.1
NetLED_BMSFLT_A: LED_BMSFLT.A R_BMSFLT.1
NetNMOS_AIRSIG_3: NMOS_AIRSIG.3 Q1.57 R_AIRPU.2
NetNMOS_BMSFLT_1: NMOS_BMSFLT.1 Q1.29
NetPRECHARGE_LED_A: PRECHARGE_LED.A R_PRECHARGE_LED.1 | length 1.1
  Top Layer w0.254: PRECHARGE_LED.A R_PRECHARGE_LED.1
NetR_DIST_1: R_DIST.1 RELAY_PRECHARGE_TIMING.3 | length 1.5
  Bottom Layer w0.152: R_DIST.1 46.02,35.75 RELAY_PRECHARGE_TIMING.3
NetR_SET_1: R_SET.1 RELAY_PRECHARGE_TIMING.5 | length 1.7
  Top Layer w0.254: RELAY_PRECHARGE_TIMING.5 RELAY_PRECHARGE_TIMING.5@46.164,30.566
  Bottom Layer w0.152: R_SET.1 44.56,30.69 RELAY_PRECHARGE_TIMING.5
PRECHARGE: NMOS_PRECHARGE.1 PRECHARGE_LED_DRV.1 R_PU.1 U4.1 | length 19.4
  Top Layer w0.152: 49.95,32.1 51.045,32.1 U4.1
  Top Layer w0.254: v1(49.7,36.1) 49.7,33.645 50.613,32.732 50.972,32.732 51.145,32.559 U4.1 51.145,28.795 PRECHARGE_LED_DRV.1
  Bottom Layer w0.152: v1(49.7,36.1) 50.3,36.7 50.3,42.5 51.825,44.025 v1(52.9,44.025)
Precharge+: RELAY_PRECHARGE.7 X_HV.P$5 | length 30.2
  Top Layer w0.152: RELAY_PRECHARGE.7 72.14,23.64 74.5,26 81,26 90.964,16.036 X_HV.P$5
PRECHARGE_COMPLETE: PRECHARGE_LED.K PRECHARGE_LED_DRV.3 | length 59.8
  Top Layer w0.152: 19.3,54 19.516,54 20.074,54.559 20.074,54.774 20.9,55.6 34.073,55.6 34.245,55.429 35.368,54.305 36.401,54.305 37.63,53.076 37.63,41.12 44.175,34.575 44.175,31.099 48.674,26.6 PRECHARGE_LED_DRV.3@50.05,26.6
  Top Layer w0.254: PRECHARGE_LED_DRV.3@50.273,26.973 50.373,26.973 51.3,27.9 56.12,27.9 56.527,27.493 56.552,27.493 56.8,27.245 PRECHARGE_LED.K
  other v1: 50.05,26.65
PWR_IN: LDO_3V3.3 LDO_VDD.3 R_BMSFLT.2 X1.1 X2.1 | length 91.5
  Top Layer w0.152: 9.93,70.5 10.146,70.5 10.704,69.941 10.704,69.726 X1.1@14.715,65.715 ; 13.715,64.785 11.95,63.02 11.95,33.9 14.807,31.042 14.875,30.975 14.875,30.075
  Bottom Layer w0.254: 18.5,69.57 25.93,77 28.775,77 ; v1(28.7,60) 28.766,60.066 28.766,60.311 28.775,60.32 28.775,70 39.2,70 ; v1(41.4,67.8) 39.2,70 ; v1(49.3,67.8) 47.1,70 39.2,70
RELAY-: NMOS_PRECHARGE.3 | length 1.6
  Bottom Layer w0.152: v1(49,30.1) 50.16,31.26
  other v1: 52.9,48.8
RESET: Q1.7 R_RSTPU.2 X5.P$2 | length 3.6
  Bottom Layer w0.152: 28.55,26.425 31,28.875 X5.P$2
SWCLK: X5.P$4
SWDIO: X5.P$3 | length 0.1
  Top Layer w0.152: X5.P$3@28.46,28.935 X5.P$3
TIMING: C_TIMING.2 RELAY_PRECHARGE_TIMING.4 U4.3 | length 12
  Top Layer w0.254: U4.3 53.685,30.2 54.6,29.285 C_TIMING.2
  Bottom Layer w0.152: RELAY_PRECHARGE_TIMING.4 47.07,32.2 v1(53.7,32.2)
V_TRIG: R_TRIG_B.2 R_TRIG_T.1 U4.2 | length 4.7
  Top Layer w0.254: U4.2 52.415,28.665 R_TRIG_B.2 R_TRIG_T.1
pads on no net: CONN_ISO.TAB1 CONN_ISO.TAB2 Q1.2 Q1.3 Q1.4 Q1.5 Q1.6 Q1.8 Q1.9 Q1.10 Q1.11 Q1.14 Q1.15 Q1.16 Q1.17 Q1.24 Q1.25 Q1.28 Q1.30 Q1.35 Q1.36 Q1.38 Q1.39 Q1.40 Q1.41 Q1.42 Q1.43 Q1.46 Q1.49 Q1.50 Q1.51 Q1.52 Q1.53 Q1.54 Q1.55 Q1.56 Q1.58 Q1.59 Q1.61 Q1.62 RELAY_PRECHARGE_TIMING.8 RELAY_PRECHARGE_TIMING.9 RELAY_PRECHARGE_TIMING.10 U4.5 U4.6 U4.7 X1.P$3 X1.P$4 X2.P$3 X2.P$4 X3.P$3 X3.P$4 X4.1 X4.2 X4.3 X4.P$3 X4.P$4 X_HV.TAB1 X_HV.TAB2 X_ISO.2 X_ISO.5
copper on no net: | length 111.6
  Top Layer w0.152: 12,26.75 12,28.6 ; 16.125,30.075 16.125,30.1 16.424,30.399 16.449,30.399 17.05,31 20,31 26.575,31 28.6,33.025 28.6,48.1 28.7,48 ; 19.3,48 v1(21.275,48) ; v1(24.425,34.525) 24.47,34.57 v1@24.5,34.57
  Bottom Layer w0.152: v1(19.3,51) 19.3,39.65 v1(24.425,34.525) ; v1(21.275,48) 30.5,57.225 30.5,65 32,66.5 50.7,66.5 53.7,63.5 53.7,49.475 53.9,49.275
  other v1: 28.95,18.35 21.5,34.57 19.3,57 17.43,57.5

## Polygon pours and split planes (outlines as drawn)
5V on Top Layer "Top Layer-5V" (solid, pour order 0): 39,71 47.5,71 47.5,52 39,52
3V3 on Top Layer "Top Layer-3V3" (solid, pour order 4): 47.8,71 56.3,71 56.3,52 47.8,52
GND on Bottom Layer "Bottom Layer-GND" (solid, shelved, pour order 6): 10,10 10,78 59.1,78 59.1,10

## Keep-outs
Keep-Out Layer:
  the board outline again, w0.15

## Silkscreen, mask and mechanical layers (free items; w line width, h text height)
Top Overlay:
  lines w0.15: 59.2,10.075 59.2,73 ; 72,10 72,73
  text "5V" at 42,58.4 h1.52
  text "3.3V" at 50.4,58.4 h1.52
  text "DEBUG" at 11.525,35.275 h0.91 r270
  text "FAULT" at 15.675,34.925 h0.91 r270
  text "Precharged" at 57.8,29.7 h0.91 r90
  text "HV+" at 88.5,27.5 h0.91
  text "BMS" at 74,25 h1.52
  text "AIR" at 44.2,24.6 h0.91
  text "IMD+" at 87.5,24.5 h0.91
  text "IMD-" at 87.5,21.5 h0.91
  text "IP" at 83.3,18.6 h0.91
  text "HV-" at 88.5,18.5 h0.91
  text "IM" at 83.3,15.6 h0.91
  text "PCG+" at 87.5,15.5 h0.91
Mechanical 1:
  lines w0.15: 10,10 100,10 100,78 10,78 10,10

## Dimensions
71.975,70.525 to 59.275,70.525 on Top Overlay

## Text inside footprints (layer, text, board x,y; h text height)
UCOMM: Top Overlay "*" at 49.416,19.451 h1.97